# Allegro board CC1310EM-SKY66115-4051 Rev2_0_2.brd
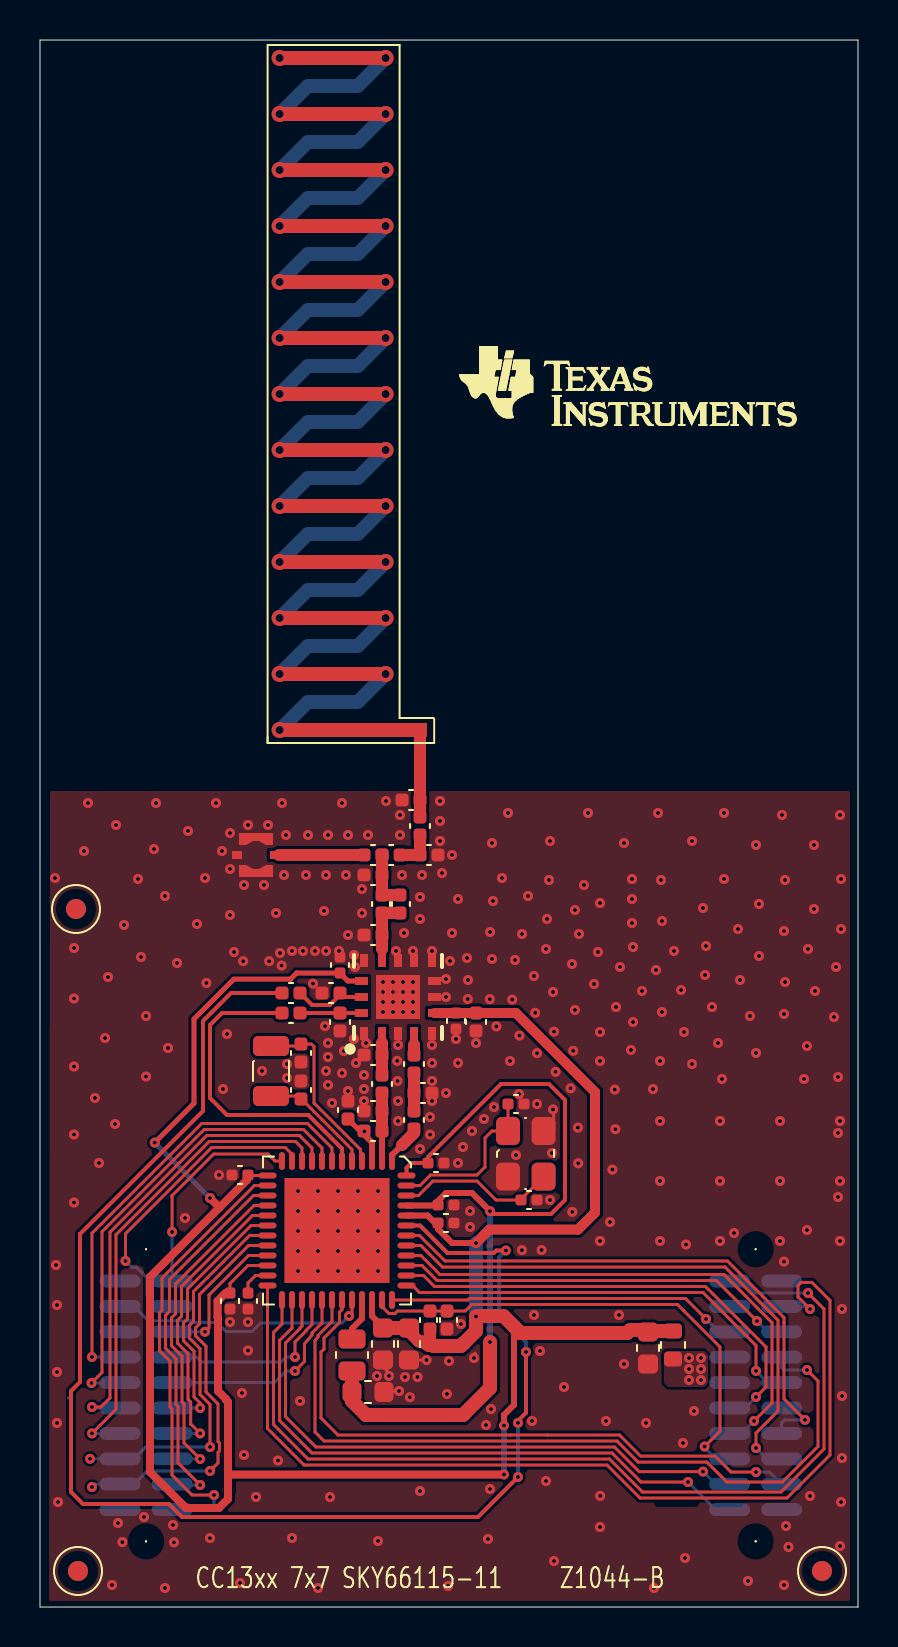
[diagram p0: board, top side]
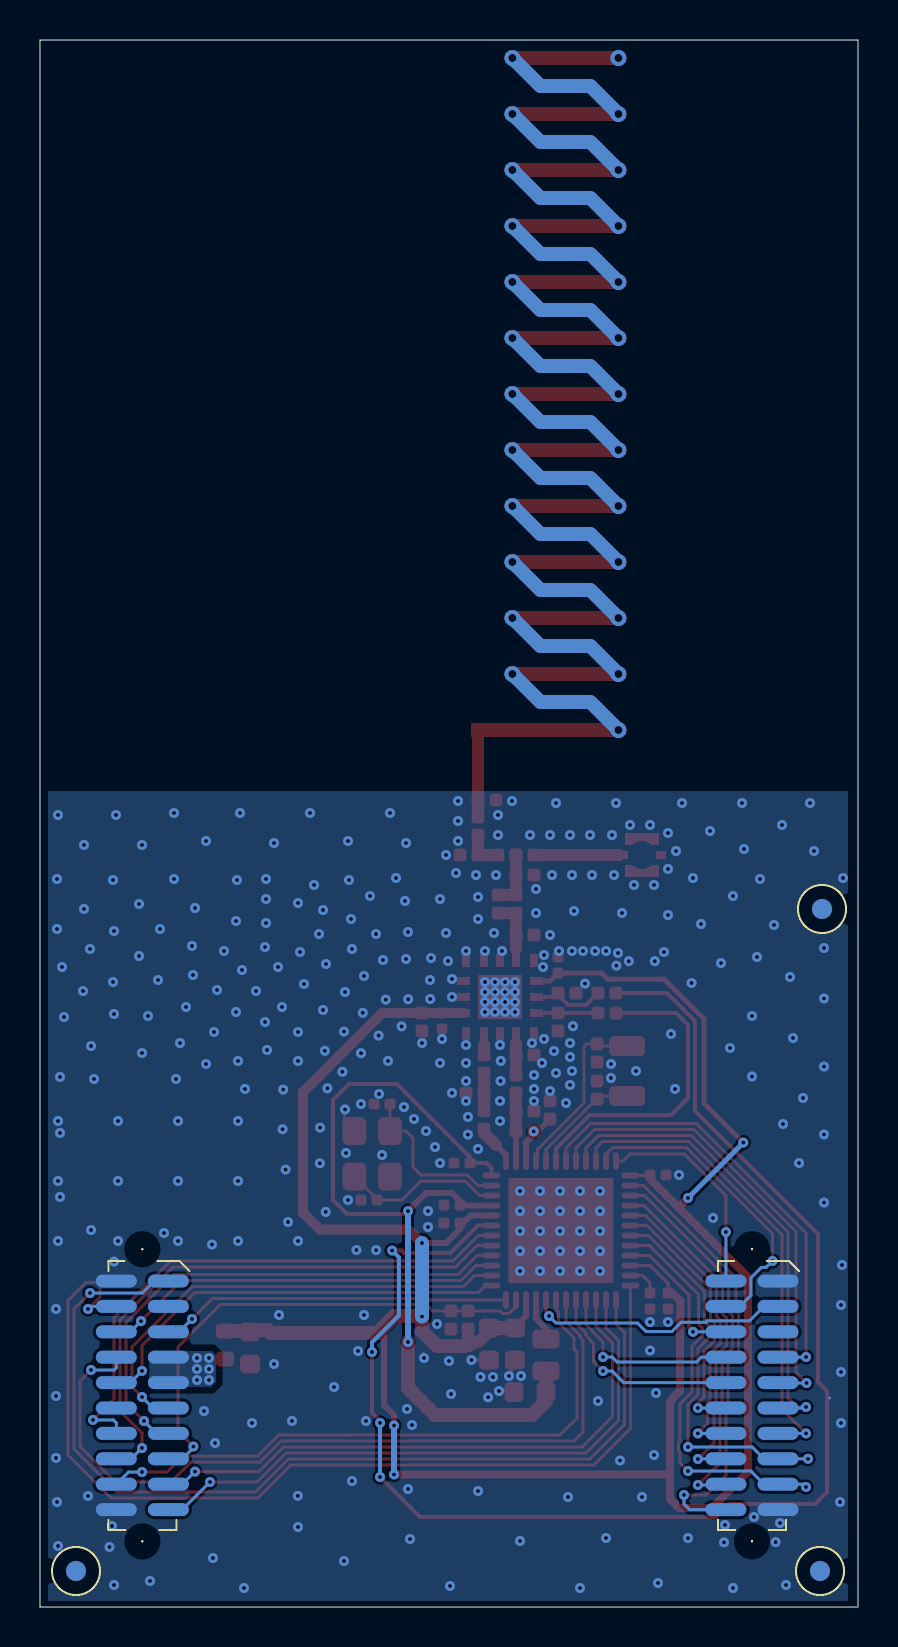
[diagram p1: board, bottom side, seen from below]

Outline 40.9 x 78.35 mm; copper layers: TOP, BOTTOM. Coordinates in mm from the lower left corner of the outline.
Outline path: 0,78.35 0,0 40.9,0 40.9,78.35 0,78.35

## Placement (name value [footprint] x y rotation side)
A2  ANTENNA  [ANTENNA_433MHZ_A]  11.5 43.85 90 top
ANT1  4.7pF  [CAPC1005X60N]  19 37.6 0 top
ANT2  56nH  [INDC1005X60N]  19 38.6 90 top
ANT3  DNM  [CAPC1005X60N]  19 40.35 180 top
C1  DNM  [CAPC1608X90N]  30.4 13.75 270 top
C11  4.7pF  [CAPC1005X60N]  16.2 24.8 0 top
C12  DNM  [CAPC1005X60N]  16.2 27.6 0 top
C25  1uF  [CAPC1005X60N]  21.8 29.7 270 top
C26  100nF  [CAPC1005X60L]  20.8 29.7 270 top
C29  100nF  [CAPC1005X60L]  15 31.7 90 top
C41  12pF  [CAPC1005X60N]  13.05 28.15 270 top
C46  1nF  [CAPC1005X60N]  15 29.7 270 top
C47  1nF  [CAPC1005X60N]  15 30.7 180 top
C51  12pF  [CAPC1005X60N]  13.05 25.4 90 top
C63  100pF  [CAPC1005X60N]  17.11 37.6 0 top
C72  DNM  [CAPC1005X60N]  16.2 37.6 0 top
C131  100nF  [CAPC1005X60L]  10.4 21.6 180 top
C221  100nF  [CAPC1005X60L]  9.5 15.7 270 top
C231  1uF  [CAPC1005X60L]  10.4 15.7 270 top
C331  22uF  [CAPC1608X90N]  15.6 10.75 0 top
C341  22uF  [CAPC1608X90N]  17.15 13.95 270 top
C342  100nF  [CAPC1608X90N]  18.45 13.95 270 top
C351  100nF  [CAPC1005X60N]  20.35 14.8 270 top
C441  100nF  [CAPC1005X60L]  19.9 19.2 0 top
C451  100nF  [CAPC1005X60L]  19.9 20.1 0 top
C461  DNM  [CAPC1005X60L]  24.05 20.35 0 top
C471  DNM  [CAPC1005X60L]  23.4 25.15 0 top
C481  100nF  [CAPC1005X60L]  19.4 22.2 0 top
C484  DNM  [CAPC1005X60N]  18 35.6 270 top
C485  DNM  [CAPC1005X60N]  16.2 33.6 0 top
C486  DNM  [CAPC1005X60N]  16.2 36.6 0 top
C487  0R  [CAPC1005X60N]  18.7 26.7 90 top
C488  330pF  [CAPC1005X60N]  15.4 25.3 270 top
C489  330pF  [CAPC1005X60N]  18.7 23.9 90 top
FIDU1  FIDU_1MM  [FID100X115]  1.9 1.8 0 top
FIDU2  FIDU_1MM  [FID100X115]  39.1 1.8 0 top
FIDU3  FIDU_1MM  [FID100X115]  1.8 34.9 0 top
FIDU4  FIDU_1MM  [FID100X115]  1.9 1.8 180 bottom
FIDU5  FIDU_1MM  [FID100X115]  39.1 1.8 180 bottom
FIDU6  FIDU_1MM  [FID100X115]  1.8 34.9 180 bottom
FL1  BLM18HE152SN1  [FIL_BLM18HE152SN1DL]  31.65 13.8 270 top
J1  SMA_MM5829-2700RJ4  [JSC_JACK]  10.8 37.6 90 top
L1  270nH  [INDC1005X60N]  16.2 23.8 0 top
L11  22nH  [INDC1005X60N]  17.1 25.7 90 top
L331  6.8uH  [INDC2012X150L]  15.6 13.4 270 top
L332  0R  [INDC1005X60N]  17.1 34.7 90 top
L333  DNM  [INDC1005X60N]  19.6 25.7 180 top
NOREF  -  []  21.95 63.05 0 top
NOREF#2  -  []  26.8 51.6 0 top
P1  SFM-110-02-S-D-A-K-TR  [SAMTEC_SFM11002AN]  4 16.3 0 bottom
P2  SFM-110-02-S-D-A-K-TR  [SAMTEC_SFM11002AN]  34.48 16.3 0 bottom
R21  1K  [RESC1005X40N]  13 29.7 180 top
R22  1K  [RESC1005X40N]  13 30.7 180 top
R351  100k  [RESC1005X40N]  19.5 14.8 270 top
U7  CC13xx 7x7  [QFNFC50P700X700X80-49CN]  17.6 22.3 180 top
U8  SKY66115-11  [MCM80P400X400-16-200]  17.9 30.5 90 top
Y1  32.768kHz  [XTAL_FC-135N]  11.55 28.05 270 top
Y2  24MHz  [OSCCC250X320X60-4N]  23.4 23.8 270 top

## Library data of the parts
A2 = ANTENNA
ANT1 C11 C488 C489 = CAPACITOR: User Part Number: #PN
ANT2 L1 = INDUCTOR: alternate symbols: (INDC1005X60L,INDC1005X60M)
ANT3 C12 C25 C41 C51 C63 C72 C351 C484-C487 = CAPACITOR: User Part Number: #PN; alternate symbols: (CAPC1005X60L,CAPC1005X60M)
C1 C331 C341 C342 = CAPACITOR: alternate symbols: (CAPC1608X90L,CAPC1608X90M)
C26 C29 C131 C221 C231 C441 C451 C461 C471 C481 = CAPACITOR: alternate symbols: (CAPC1005X60L,CAPC1005X60M)
C46 C47 = CAPACITOR: alternate symbols: (CAPC1005X60M,CAPC1005X60L)
FIDU1-FIDU6 = FIDMARK
FL1 = FILTER_2PIN: alternate symbols: (FIL_BLM18HE152SN1DL,FIL_BLM18HE152SN1DM)
J1 = SMA_MM5829-2700RJ4
L11 L332 L333 = INDUCTOR: alternate symbols: (INDC1005X60M,INDC1005X60L)
L331 = INDUCTOR
P1 P2 = CONN_HEADER_2X10_P_S
R21 R22 R351 = RESISTOR: alternate symbols: (RESC1005X40L,RESC1005X40M)
U7 = IC_RF_CC13XX_7X7_QFN48_V2_1: alternate symbols: (QFNFC50P700X700X80-49CL,QFNFC50P700X700X80-49CM)
U8 = SKY66115-11
Y1 = CRYSTAL: alternate symbols: (XTAL_FC-135L,XTAL_FC-135M)
Y2 = XTAL_4PIN_S: alternate symbols: (OSCCC250X320X60-4L,OSCCC250X320X60-4M)

## Footprints (pads in the part's own frame, mm; a bottom-side part is the same pattern mirrored in y, then rotated)
ANTENNA_433MHZ_A
  rect 0.7x0.7 smd: 1(0,-7.5)
CAPC1005X60L
  custom 0.55x0.54 smd: 1(0,0) 2(0.8,0)
CAPC1005X60N
  custom 0.65x0.64 smd: 1(0,0) 2(0.9,0)
CAPC1608X90N
  custom 0.95x1 smd: 1(0,0) 2(1.6,0)
FID100X115
  oval 1x1 smd: 1(0,0)
FIL_BLM18HE152SN1DL
  custom 0.75x0.9 smd: 1(0,0) 2(1.4,0)
INDC1005X60N
  custom 0.65x0.64 smd: 1(0,0) 2(0.9,0)
INDC2012X150L
  custom 0.95x1.352 smd: 1(0,0) 2(1.6,0)
JSC_JACK
  rect 0.4x0.5 smd: 1(0,-0.95) 2(0,0.95)
  custom 0.6x1.7 smd: 3(0.8,0) 4(-0.8,0)
MCM80P400X400-16-200
  rect 0.65x0.4 smd: 1(-1.825,1.7) 2(-1.825,0.8) 3(-1.825,0) 4(-1.825,-0.8) 5(-1.825,-1.7) 9(1.825,-1.7) 10(1.825,-0.8) 11(1.825,0) 12(1.825,0.8) 13(1.825,1.7)
  rect 0.4x0.65 smd: 6(-0.8,-1.825) 7(0,-1.825) 8(0.8,-1.825) 14(0.8,1.825) 15(0,1.825) 16(-0.8,1.825)
  rect 2.2x2.2 smd: 17(0,0)
OSCCC250X320X60-4N
  custom 1.4x1.2 smd: 1(0,0) 2(2.28,0) 3(2.28,1.78) 4(0,1.78)
QFNFC50P700X700X80-49CN
  oval 0.3x0.9 smd: 1(0,0) 2(0.5,0) 3(1,0) 4(1.5,0) 5(2,0) 6(2.5,0) 7(3,0) 8(3.5,0) 9(4,0) 10(4.5,0) 11(5,0) 12(5.5,0) 25(5.5,6.95) 26(5,6.95) 27(4.5,6.95) 28(4,6.95) 29(3.5,6.95) 30(3,6.95) 31(2.5,6.95) 32(2,6.95) 33(1.5,6.95) 34(1,6.95) 35(0.5,6.95) 36(0,6.95)
  oval 0.9x0.3 smd: 13(6.225,0.725) 14(6.225,1.225) 15(6.225,1.725) 16(6.225,2.225) 17(6.225,2.725) 18(6.225,3.225) 19(6.225,3.725) 20(6.225,4.225) 21(6.225,4.725) 22(6.225,5.225) 23(6.225,5.725) 24(6.225,6.225) 37(-0.725,6.225) 38(-0.725,5.725) 39(-0.725,5.225) 40(-0.725,4.725) 41(-0.725,4.225) 42(-0.725,3.725) 43(-0.725,3.225) 44(-0.725,2.725) 45(-0.725,2.225) 46(-0.725,1.725) 47(-0.725,1.225) 48(-0.725,0.725)
  rect 5.25x5.25 smd: 49(2.75,3.475)
RESC1005X40N
  custom 0.65x0.64 smd: 1(0,0) 2(0.9,0)
SAMTEC_SFM11002AN
  round 0.099 hole 1.501 unplated: (1.302,-1.588) (1.302,13.018)
  oval 2.05x0.65 smd: 1(0,0) 2(2.604,0) 3(0,1.27) 4(2.604,1.27) 5(0,2.54) 6(2.604,2.54) 7(0,3.81) 8(2.604,3.81) 9(0,5.08) 10(2.604,5.08) 11(0,6.35) 12(2.604,6.35) 13(0,7.62) 14(2.604,7.62) 15(0,8.89) 16(2.604,8.89) 17(0,10.16) 18(2.604,10.16) 19(0,11.43) 20(2.604,11.43)
XTAL_FC-135N
  custom 1x1.8 smd: 1(0,0) 2(2.5,0)

## Nets
GND: ANT1.2 ANT3.2 C1.2 C11.1 C12.1 C25.2 C26.2 C29.2 C41.2 C46.2 C47.2 C51.2 C131.2 C221.2 C231.2 C331.2 C341.2 C342.2 C351.2 C441.2 C451.2 C461.2 C471.2 C481.2 C485.1 C486.1 C488.1 J1.2 J1.3 J1.4 L333.1 P1.1 P1.19 P2.2 P2.20 U7.49(VSS) U8.1(GND_1) U8.3(GND_3) U8.5(GND_5) U8.7(GND_7) U8.8(GND_8) U8.9(GND_9) U8.10(GND_10) U8.11(GND_11) U8.13(GND_13) U8.17(PAD) Y2.2 Y2.4
VDD_EB: FL1.2 P2.7 P2.9
VDDR: C331.1 C451.1 C481.1 L331.2 U7.45(VDDR#45) U7.48(VDDR#48)
VDDS: C1.1 C25.1 C26.1 C29.1 C131.1 C221.1 C341.1 C342.1 C441.1 FL1.1 R351.2 U7.13(VDDS2) U7.22(VDDS3) U7.34(VDDS_DCDC) U7.44(VDDS) U8.6(VCC) U8.14(VDD)
DCDC_SW: L331.1 U7.33(DCDC_SW)
DIO_1: R21.2 U7.6(DIO_1)
DIO_2: P1.7 U7.7(DIO_2)
DIO_3: P1.9 U7.8(DIO_3)
DIO_4: P1.11 U7.9(DIO_4)
DIO_5: P1.13 U7.10(DIO_5)
DIO_6: P1.4 U7.11(DIO_6)
DIO_7: P1.2 U7.12(DIO_7)
DIO_8 / SPI MISO: P1.20 U7.14(DIO_8)
DIO_9 / SPI MOSI: P1.18 U7.15(DIO_9)
DIO_10 / SPI CLK: P1.16 U7.16(DIO_10)
DIO_11 / SPI SS: P1.14 U7.17(DIO_11)
DIO_12: P1.12 U7.18(DIO_12)
DIO_13: P1.15 U7.19(DIO_13)
DIO_14: P1.17 U7.20(DIO_14)
DIO_15: P1.6 U7.21(DIO_15)
DIO_16 / JTAG TDO: P2.19 U7.26(DIO_16)
DIO_17 / JTAG TDI: P2.17 U7.27(DIO_17)
DIO_18: P1.8 U7.28(DIO_18)
DIO_19: P1.10 U7.29(DIO_19)
DIO_20: P2.8 U7.30(DIO_20)
DIO_21: P2.18 U7.31(DIO_21)
DIO_22: P1.3 U7.32(DIO_22)
DIO_23: P2.5 U7.36(DIO_23)
DIO_24: P2.10 U7.37(DIO_24)
DIO_25: P2.11 U7.38(DIO_25)
DIO_26: P2.6 U7.39(DIO_26)
DIO_27: P2.13 U7.40(DIO_27)
DIO_28: P2.16 U7.41(DIO_28)
DIO_29: P2.14 U7.42(DIO_29)
DIO_30: R22.2 U7.43(DIO_30)
JTAG_TCK: P2.1 U7.25(JTAG_TCKC)
JTAG_TMS: P2.4 U7.24(JTAG_TMSC)
NRESET: C351.1 P2.15 R351.1 U7.35(RESET_N)
N310466: C471.1 U7.47(X24M_P) Y2.1
N310868: C461.1 U7.46(X24M_N) Y2.3
N314488: C11.2 L1.2 L11.1 U7.2(RF_N)
N316022: A2.1(FEED/GND_1) ANT2.2 ANT3.1
N316651: C231.1 U7.23(DCOUPL)
N316919: C41.1 U7.4(X32K_Q1) Y1.1
N316932: C51.1 U7.5(X32K_Q2) Y1.2
N342232: ANT1.1 ANT2.1 C63.2
N347200: C12.2 L11.2 U8.2(RX)
N354233: C72.1 J1.1
N403626: C63.1 C72.2 C484.1 C486.2 L332.2
N438793: C46.1 R21.1 U8.16(CTX)
N438802: C47.1 R22.1 U8.15(CSD)
N466935: C488.2 L1.1 U7.3(RX_TX)
N487790: C484.2 C485.2 L332.1 U8.12(ANT)
N493453: C487.2 U8.4(TX)
N493483: C487.1 C489.2 L333.2
N503467: C489.1 U7.1(RF_P)

Pads without a net: FIDU1 1; FIDU2 1; FIDU3 1; FIDU4 1; FIDU5 1; FIDU6 1; P1 5; P2 3 12

## Via types
v1: diameter 0.8, hole 0.4, TOP to BOTTOM, 25 vias
v2: diameter 0.5, hole 0.2, TOP to BOTTOM, 422 vias

## Routing (per net, layer and track width the routed paths; a pad name or vN(x,y) marks a point on that pad's centre or on a via; arc(x,y) is an arc through that point)
GND: length 4.1
  TOP w0.15: v2(17.95,10.8) 17.2,10.8 17.1,10.7 ; v2(17.45,11.55) 17.45,11.7 17.15,12 C341.2 ; v2(25.65,24.88) 25.65,24.8 25.68,24.77 25.68,23.8 ; v2(14.9,18.8) 14.88,18.82 U7.49 ; C342.2 v2(19.33,12.35) ; 21.75,12.7 21.75,12.45
  BOTTOM w0.15: 1.43,10.45 1.43,10.45
  vias: v2(0.75,36.45) v2(0.8,17.1) v2(0.85,15.1) v2(0.85,11.75) v2(0.85,9.2) v2(0.9,5.25) v2(1.7,32.95) v2(1.7,30.42) v2(1.7,27.02) v2(1.7,23.62) v2(1.7,20.22) v2(2.2,37.8) v2(2.4,40.2) v2(2.75,25.45) v2(2.95,22.2) v2(3.25,28.45) v2(3.4,31.5) v2(3.6,1.1) v2(3.75,24.15) v2(3.8,39.1) v2(3.9,4.2) v2(4.12,3.24) v2(4.2,34.1) v2(4.9,36.4) v2(5.05,32.5) v2(5.2,4.5) v2(5.3,29.55) v2(5.3,26.52) v2(5.7,37.9) v2(5.8,40.2) v2(6.25,35.55) v2(6.25,0.95) v2(6.4,27.95) v2(6.65,4.1) v2(6.7,3.23) v2(6.85,32.2) v2(7.25,19.45) v2(7.4,38.8) v2(7.85,34.15) v2(8.25,36.45) v2(8.32,31.2) v2(8.5,3.45) v2(8.8,40.2) v2(8.95,21.6) v2(9.1,37.8) v2(9.15,25.9) v2(9.35,28.65) v2(9.5,38.7) v2(9.5,36.9) v2(9.5,34.6) v2(9.5,14.25) v2(9.7,32.75) v2(10,1.2) v2(10.1,10.7) v2(10.2,36.1) v2(10.16,32.29) v2(10.2,7.6) v2(10.4,39.1) v2(10.4,14.25) v2(10.4,12.82) v2(10.8,5.5) v2(11.1,26.8) v2(11.2,36.1) v2(11.4,39.1) v2(11.46,32.29) v2(11.8,34.7) v2(11.9,7.32) v2(12,32.7) v2(12.1,40.2) v2(12.08,32.07) v2(12.2,36.6) v2(12.3,38.6) v2(12.35,27.15) v2(12.35,26.45) v2(12.6,32.8) v2(12.6,3.45) v2(12.9,20.8) v2(12.9,19.8) v2(12.9,18.8) v2(12.9,17.8) v2(12.9,16.8) v2(13,10.3) v2(13.15,32.8) v2(13.3,36.6) v2(13.4,38.6) v2(13.65,31.17) v2(13.75,32.8) v2(13.9,20.8) v2(13.9,19.8) v2(13.9,18.8) v2(13.9,17.8) v2(13.9,16.8) v2(13.9,0.95) v2(14.2,34.8) v2(14.3,36.6) v2(14.3,32.8) v2(14.25,29.04) v2(14.3,26.8) v2(14.4,38.6) v2(14.4,28.2) v2(14.4,27.5) v2(14.4,26.1) v2(14.5,5.5) v2(14.6,25.2) v2(14.9,20.8) v2(14.9,19.8) v2(14.9,17.8) v2(14.9,16.8) v2(14.95,32.8) v2(15.1,40.2) v2(15.1,26.7) v2(15.2,27.8) v2(15.3,36.6) v2(15.4,38.6) v2(15.4,33.6) v2(15.4,25.8) v2(15.7,32.6) v2(15.75,32) v2(15.7,28.4) v2(15.8,27.2) v2(15.9,20.8) v2(15.9,19.8) v2(15.9,18.8) v2(15.9,17.8) v2(15.9,16.8) v2(16.1,35.9) v2(16.1,34.7) v2(16.2,26.6) v2(16.2,25.9) v2(16.2,25.3) v2(16.3,28.2) v2(16.4,38.6) v2(16.85,11.55) v2(16.9,20.8) v2(16.9,19.8) v2(16.9,18.8) v2(16.9,17.8) v2(16.9,16.8) v2(16.9,3.3) v2(17.15,31.25) v2(17.15,30.75) v2(17.15,30.25) v2(17.15,29.75) v2(17.3,40.3) v2(17.65,31.25) v2(17.65,30.75) v2(17.65,30.25) v2(17.65,29.75) v2(17.8,32.8) v2(17.9,28.1) v2(17.86,27.3) v2(17.88,26.3) v2(17.9,25.3) v2(17.9,24.3) v2(18,39.6) v2(18,38.6) v2(18.1,36.6) v2(18.2,33.7) v2(18.15,31.25) v2(18.15,30.75) v2(18.15,30.25) v2(18.15,29.75) v2(18.25,11.5) v2(18.5,10.49) v2(18.65,32.8) v2(18.65,31.25) v2(18.65,30.75) v2(18.65,30.25) v2(18.65,29.75) v2(18.88,11.5) v2(19,35.5) v2(19,34.4) v2(19,22.9) v2(19,5.8) v2(19.1,36.6) v2(19.5,24.5) v2(19.51,23.62) v2(19.6,32.8) v2(19.6,28.1) v2(19.6,27.2) v2(19.6,26.3) v2(19.6,25.3) v2(20,40.3) v2(20,39.3) v2(20,38.3) v2(20.1,36.7) v2(20.3,31.4) v2(20.3,30.5) v2(20.3,25.7) v2(20.35,10.65) v2(20.45,12.3) v2(20.4,1.05) v2(20.5,32.3) v2(20.6,37.6) v2(20.6,33.7) v2(20.8,28.4) v2(20.9,35.4) v2(20.9,27.2) v2(20.9,22.2) v2(21.05,14.15) v2(21.15,23) v2(21.35,32.45) v2(21.4,31.35) v2(21.39,30.4) v2(21.5,19.8) v2(21.5,19) v2(21.6,23.8) v2(21.7,12.45) v2(21.8,28.2) v2(22.2,24.4) v2(22.3,9.1) v2(22.4,3.4) v2(22.5,33.75) v2(22.49,30.39) v2(22.5,5.9) v2(22.6,38.2) v2(22.6,32.4) v2(22.55,9.9) v2(22.65,35.3) v2(22.7,25) v2(22.82,29.03) v2(23.1,36.45) v2(23.4,39.7) v2(23.5,27.3) v2(23.61,30.37) v2(23.75,32.35) v2(23.8,22.6) v2(23.95,25.65) v2(23.97,28.57) v2(24.1,33.65) v2(24.09,17.84) v2(24.4,35.55) v2(24.6,9.3) v2(24.7,31.55) v2(24.7,14.6) v2(24.76,29.71) v2(24.85,27.69) v2(24.85,25.15) v2(25,12.8) v2(25.08,17.85) v2(25.35,34.4) v2(25.3,32.9) v2(25.3,6.3) v2(25.45,36.35) v2(25.5,38.3) v2(25.5,20.35) v2(25.6,22.7) v2(25.65,30.75) v2(25.7,28.77) v2(25.7,2.3) v2(25.78,26.76) v2(26.2,11) v2(26.53,25.93) v2(26.6,32.15) v2(26.62,19.75) v2(26.75,34.85) v2(26.75,29.85) v2(26.66,27.81) v2(26.95,33.65) v2(26.89,23.97) v2(26.91,22.18) v2(27.2,36.1) v2(27.4,39.7) v2(27.7,31.15) v2(27.9,32.75) v2(28,35.2) v2(28,28.75) v2(28,27.3) v2(28,18.3) v2(28.01,5.55) v2(28,4) v2(28.3,9.3) v2(28.5,19.25) v2(28.62,21.87) v2(28.74,25.87) v2(28.8,30) v2(28.77,23.89) v2(28.95,14.6) v2(29,32) v2(29.2,38.2) v2(29.2,12.15) v2(29.6,36.4) v2(29.6,35.4) v2(29.6,34.2) v2(29.65,33) v2(29.65,29.25) v2(29.55,27.85) v2(30.1,30.8) v2(30.3,9.2) v2(30.65,25.9) v2(30.7,0.95) v2(30.8,31.85) v2(30.9,39.7) v2(31,27.3) v2(31,24.3) v2(31,21.3) v2(31,18.3) v2(31.05,36.35) v2(31.1,34.3) v2(31.1,29.75) v2(31.7,32.8) v2(32.05,30.85) v2(32.15,8.2) v2(32.2,28.75) v2(32.3,18.12) v2(32.25,2.45) v2(32.6,38.3) v2(32.6,27.15) v2(32.7,9.8) v2(33.15,34.95) v2(33.3,33.05) v2(33.25,31.6) v2(33.6,30) v2(33.9,28.2) v2(34,24.3) v2(34,21.3) v2(34,18.3) v2(34.1,26.4) v2(34.2,39.7) v2(34.2,36.4) v2(34.7,18.7) v2(34.9,33.9) v2(35,31.35) v2(35.4,1.3) v2(35.5,29.55) v2(35.8,38.1) v2(35.8,27.7) v2(35.95,35.15) v2(35.95,32.55) v2(37,24.3) v2(37,21.3) v2(37,18.3) v2(37.1,39.6) v2(37.2,33.8) v2(37.2,29.65) v2(37.2,17.27) v2(37.2,1.1) v2(37.25,36.35) v2(37.25,31.25) v2(37.3,4.05) v2(37.42,3) v2(38.2,26.4) v2(38.4,32.9) v2(38.35,28.05) v2(38.35,18.85) v2(38.5,5.55) v2(38.7,38.1) v2(38.7,34.9) v2(38.75,30.8) v2(39.7,29.5) v2(39.8,32) v2(39.9,26.5) v2(39.9,23.7) v2(39.9,20.5) v2(40,39.6) v2(40,24.3) v2(40,21.3) v2(40,18.3) v2(40,3.05) v2(40.05,36.4) v2(40.05,33.9) v2(40.1,14.9) v2(40.1,10.55) v2(40.1,7.45) v2(40.05,5.25)
VDD_EB:
  vias: v2(32.45,12.45) v2(32.45,11.9) v2(32.45,11.35) v2(33.05,12.45) v2(33.05,11.9) v2(33.05,11.35)
VDDR: length 42.7
  TOP w0.2: U7.48 18.32,21.95 18.57,22.2 C481.1 19.4,22.5 23.05,26.15 25.45,26.15 26.25,25.35 26.25,20.35 25.55,19.65 22.65,19.65 22.5,19.8
  TOP w0.3: U7.45 19.88,20.07 C451.1 19.9,20.3 20.3,20.7 21.6,20.7 22.5,19.8 v2(22.5,19.79)
  TOP w0.7: v2(22.5,13.25) 22.5,10.95 21.15,9.6 16.3,9.6 15.6,10.3 C331.1 L331.2
  BOTTOM w0.3: v2(22.5,13.25) v2(22.5,19.79)
VDDS: length 128.2
  TOP w0.15: 11.38,17.07 10.4,17.07 9.5,16.18 C221.1 ; 17.1,14.05 17.05,14.1 ; 17.1,14.05 17.15,14 C341.1 ; 17.1,14.05 17.2,14.05 ; C131.1 10.43,21.57 11.38,21.57
  TOP w0.2: 9.28,15.7 C221.1 ; 10.35,21.55 C131.1
  TOP w0.25: v2(5.74,23.22) 7.7,25.18 7.7,29.4 9.69,31.39 12.52,31.39 12.83,31.7 C29.1 ; C29.1 15,31.69 15.39,31.3 U8.14 ; C29.1 15,31.71
  TOP w0.3: 19.5,13.28 19.38,13.17 19.24,13.17 ; v2(21.8,14.52) 21.82,14.55 ; 17.3,13.95 17.2,14.05 ; 23.18,14.55 23.2,14.52 ; v2(23.2,9.07) 23.2,9.6 23.7,10.1 23.7,14.02 ; 17.05,14.1 16.6,14.55 U7.34 ; U7.44 19.38,19.57 19.75,19.2 C441.1 19.9,18.9 20.6,18.2 v2(21.8,18.2) ; C1.1 30.4,13.75 30.55,13.9 30.65,13.8 30.65,13.8 ; 18.45,14 18.4,13.95
  TOP w0.4: 9.4,6.59 9.44,6.62 v2(23.2,6.62) ; 9.4,6.59 9.4,5.4 8.95,4.95 7.3,4.95 5.5,6.75 5.5,16.5 8.97,19.97 ; 9.4,6.59 9.4,10.25 9.3,10.35 9.3,10.4 8.9,10.8 8.9,14.46 8.88,14.48 8.88,15.3 9.28,15.7 ; 10.35,21.55 10.35,21.35 8.97,19.97 ; 8.97,19.97 v2(8.5,20.45)
  TOP w0.5: U8.6 C26.1 C25.1 23.79,29.7 27.75,25.74 27.75,19.72 26.9,18.87 22.47,18.87 v2(21.8,18.2)
  TOP w0.6: 18.45,14 C342.1 18.45,13.77 18.94,13.28 19.14,13.28 19.24,13.17 ; R351.2 19.5,13.28
  TOP w0.7: 21.82,14.55 23.18,14.55 ; FL1.1 30.65,13.8 ; 18.4,13.95 17.3,13.95 ; 23.2,14.52 24.02,13.7 29.36,13.7 29.51,13.85 30.5,13.85 ; 19.38,13.17 19.45,13.1 19.64,13.1 19.69,13.05 21.04,13.05 21.19,13.2 21.2,13.2 21.8,13.8 v2(21.8,14.52)
  BOTTOM w0.25: v2(8.5,20.45) 5.74,23.21 v2(5.74,23.22)
  BOTTOM w0.3: v2(23.2,6.62) v2(23.2,9.07)
  BOTTOM w0.7: v2(21.8,14.52) v2(21.8,18.2)
DCDC_SW: length 2.2
  TOP w0.3: L331.1 15.6,13.92 16.1,14.42 U7.33
DIO_1: length 15.8
  TOP w0.2: U7.6 15.1,22.91 13.41,24.6 9.35,24.6 8.5,25.45 8.5,29.1 9.1,29.7 R21.2
DIO_2: length 23
  TOP w0.15: v2(2.6,12.5) 2.6,18.69 8.08,24.17 13.38,24.17 14.6,22.95 U7.7
  BOTTOM w0.15: v2(2.6,12.5) 2.8,12.5 2.81,12.49 P1.7
DIO_3: length 23.4
  TOP w0.15: U7.8 14.1,22.95 13.18,23.87 8.21,23.87 3.1,18.77 3.1,11.72 2.9,11.52 v2(2.57,11.2)
  BOTTOM w0.15: v2(2.57,11.2) 3.98,11.2 P1.9
DIO_4: length 23.8
  TOP w0.15: v2(2.6,10) 3.05,10 3.5,10.45 3.5,18.74 8.33,23.57 12.98,23.57 13.6,22.95 U7.9
  BOTTOM w0.15: v2(2.6,10) 2.8,10 2.85,9.95 P1.11
DIO_5: length 23.9
  TOP w0.15: U7.10 13.1,22.95 12.78,23.27 8.46,23.27 3.8,18.62 3.8,9.88 v2(2.6,8.68)
  BOTTOM w0.15: P1.13 v2(2.6,8.68)
DIO_6: length 15.7
  TOP w0.15: U7.11 12.6,22.64 12.27,22.97 8.58,22.97 4.28,18.67 v2(4.28,17.3)
  BOTTOM w0.15: P1.4 5.9,15.03 5.35,15.58 5.35,16.46 4.83,16.98 4.59,16.98 v2(4.28,17.3)
DIO_7: length 10.8
  TOP w0.15: U7.12 11.75,22.3 11.4,22.65 8.68,22.65 6.59,20.56 6.6,20.55 v2(6.6,18.75)
  BOTTOM w0.15: P1.2 v2(6.6,18.75)
DIO_8 / SPI MISO: length 22.5
  TOP w0.15: v2(8.7,5.6) 7.6,5.6 6.6,6.6 6.6,9.9 6.5,10 6.5,12.29 5.97,12.81 5.97,14.71 6.1,14.83 6.1,16.45 10.72,21.07 11.38,21.07
  BOTTOM w0.15: P1.20 8.42,4.87 8.7,5.15 v2(8.7,5.6)
DIO_9 / SPI MOSI: length 19.1
  TOP w0.15: v2(8.01,6.1) 6.9,7.21 6.9,10.03 6.8,10.13 6.8,12.41 6.28,12.94 6.28,14.58 6.47,14.78 6.47,15.52 6.47,15.52 6.47,16.27 6.47,16.27 6.47,16.37 10.68,20.57 11.38,20.57
  BOTTOM w0.15: v2(8.01,6.1) 6.64,6.1 P1.18
DIO_10 / SPI CLK: length 17.1
  TOP w0.15: 11.38,20.07 10.7,20.07 6.77,16.15 6.77,15.65 6.78,15.65 6.78,14.66 6.58,14.46 6.58,13.06 7.1,12.54 7.1,10.25 7.2,10.15 7.2,8.21 v2(8.01,7.4)
  BOTTOM w0.15: P1.16 7.83,7.41 7.84,7.4 v2(8.01,7.4)
DIO_11 / SPI SS: length 15.1
  TOP w0.15: 11.38,19.57 10.63,19.57 7.07,16.02 7.07,15.77 7.08,15.77 7.08,14.53 6.88,14.33 6.88,13.19 7.4,12.66 7.4,10.38 7.53,10.25 7.53,9.75 7.53,9.75 7.53,9.15 v2(8.01,8.68)
  BOTTOM w0.15: v2(8.01,8.68) P1.14
DIO_12: length 13.1
  TOP w0.15: 11.38,19.07 10.55,19.07 7.38,15.9 7.38,14.41 7.17,14.21 7.17,13.31 7.7,12.79 7.7,10.5 8.01,10.2 v2(8.01,9.95)
  BOTTOM w0.15: v2(8.01,9.95) P1.12
DIO_13: length 19.4
  TOP w0.15: v2(8.5,8) 8.5,10.13 8,10.63 8,12.91 7.47,13.44 7.47,14.08 7.67,14.28 7.67,15.77 10.48,18.57 11.38,18.57
  BOTTOM w0.15: v2(2.5,7.41) P1.15 4.7,7.41 5.29,8 v2(8.5,8)
DIO_14: length 20.2
  TOP w0.15: 11.38,18.07 10.43,18.07 7.97,15.62 7.97,14.16 7.78,13.96 7.78,13.56 8.3,13.04 8.3,10.75 8.9,10.15 8.9,8.27 8.97,8.2 8.97,7.8 8.9,7.73 8.9,7.2 v2(8.5,6.8)
  BOTTOM w0.15: v2(2.6,6) 2.74,6.14 P1.17 4.7,6.14 5.36,6.8 v2(8.5,6.8)
DIO_15: length 7.3
  TOP w0.15: 11.38,17.57 10.43,17.57 8.45,15.6 8.45,13.96 v2(8.25,13.76)
  BOTTOM w0.15: P1.6 v2(8.25,13.76)
DIO_16 / JTAG TDO: length 30.6
  TOP w0.15: U7.26 12.6,13.95 11.97,13.32 11.97,9.32 13.6,7.7 28.6,7.7 30.05,6.25 v2(32.4,6.25)
  BOTTOM w0.15: P2.19 33.78,4.87 v2(32.4,6.25)
DIO_17 / JTAG TDI: length 29.8
  TOP w0.15: U7.27 13.1,14.05 13,13.95 13,13.92 12.28,13.2 12.28,9.52 13.79,8 28.73,8 29.95,6.77 v2(33.15,6.77)
  BOTTOM w0.15: v2(33.15,6.77) 33.78,6.14 P2.17
DIO_18: length 9.6
  TOP w0.15: U7.28 13.6,14.13 13.3,13.83 13.3,13.8 12.75,13.25 v2(12.75,12.5)
  BOTTOM w0.15: v2(12.75,12.5) 12.3,12.5 12.05,12.25 8.07,12.25 7.83,12.49 P1.8
DIO_19: length 10.5
  TOP w0.15: U7.29 14.1,14.21 14.08,14.18 13.6,13.7 13.6,13.6 13.22,13.15 13.22,12.27 v2(12.75,11.8)
  BOTTOM w0.15: v2(12.75,11.8) 12.3,11.8 11.72,11.22 P1.10
DIO_20: length 39.8
  TOP w0.15: v2(38.35,11.85) 38.9,11.3 38.9,8.03 37.12,6.25 34.34,6.25 33.35,7.24 29.91,7.24 28.85,8.3 14.2,8.3 13.75,8.75 13.75,13.32 13.9,13.5 13.9,13.58 14.6,14.28 U7.30
  BOTTOM w0.15: v2(38.35,11.85) 37.2,11.85 37.08,11.96 P2.8
DIO_21: length 30.7
  TOP w0.15: U7.31 15.1,14.87 14.98,14.75 14.98,14.23 14.2,13.45 14.2,12.9 14.05,12.75 14.05,9.45 14.9,8.6 23.52,8.6 23.52,8.6 25.37,8.6 28.98,8.6 30.03,7.54 33.75,7.54 34.55,6.75 v2(35.8,6.75)
  BOTTOM w0.15: P2.18 36.47,6.75 v2(35.8,6.75)
DIO_22: length 13.2
  TOP w0.15: U7.32 15.6,14.7 v2(15.45,14.55)
  BOTTOM w0.15: v2(15.45,14.55) 15.1,14.2 11.02,14.2 10.6,13.77 9.3,13.77 8.84,14.23 7.61,14.23 7.53,14.31 5.42,14.31 4.7,15.03 P1.3
DIO_23: length 17.6
  TOP w0.15: v2(33.3,14.4) 32.27,15.42 21.46,15.42 21.39,15.35 U7.36
  BOTTOM w0.15: P2.5 33.94,13.76 v2(33.3,14.4)
DIO_24: length 21.5
  TOP w0.15: v2(35.8,11.8) 35.8,13.07 33.15,15.72 18.98,15.72 18.62,16.07 U7.37
  BOTTOM w0.15: P2.10 36.38,11.22 v2(35.8,11.8)
DIO_25: length 23.7
  TOP w0.15: v2(35.8,10.5) 36.3,11 36.3,13 33.27,16.02 19.73,16.02 19.18,16.57 U7.38
  BOTTOM w0.15: v2(35.8,10.5) 35.25,9.95 P2.11
DIO_26: length 20.1
  TOP w0.15: v2(35.85,14.29) 33.82,16.32 19.85,16.32 19.1,17.07 U7.39
  BOTTOM w0.15: v2(35.85,14.29) 36.38,13.76 P2.6
DIO_27: length 26.4
  TOP w0.15: v2(35.7,9.3) 36.6,10.2 36.6,14.22 35.52,15.29 35.52,15.3 34.2,16.62 19.99,16.62 19.05,17.57 U7.40
  BOTTOM w0.15: P2.13 35.08,8.68 v2(35.7,9.3)
DIO_28: length 28.5
  TOP w0.15: U7.41 19.04,18.07 20.12,17 34.25,17 35.83,15.42 35.83,15.41 36.9,14.34 36.9,9.8 35.8,8.7 v2(35.8,7.95)
  BOTTOM w0.15: P2.16 37.07,7.4 36.35,7.4 v2(35.8,7.95)
DIO_29: length 27.9
  TOP w0.15: U7.42 18.98,18.57 20.25,17.3 23.23,17.3 34.12,17.3 34.38,17.3 36.13,15.55 36.13,15.54 37.2,14.46 37.2,14.22 37.2,10.4 v2(38.25,9.35)
  BOTTOM w0.15: P2.14 37.08,9.21 37.23,9.35 v2(38.25,9.35)
DIO_30: length 72.3
  TOP w0.2: R22.2 9.55,30.7 8.15,29.3 8.15,24.8 2,18.65 2,11.25 1.55,10.8 1.55,5.75 2.15,5.15 6.45,5.15 7.1,4.5 21.9,4.5 v2(23.9,6.5) ; v2(23.3,17.82) 22.82,17.82 22.69,17.7 20.38,17.7 19,19.07 U7.43 ; v2(24.3,12.75) 24.3,9.71 23.9,9.31 v2(23.9,9.2)
  BOTTOM w0.2: v2(24.3,12.75) 24.3,13.23 22.96,14.57 22.96,17.49 v2(23.3,17.82) ; v2(23.9,6.5) v2(23.9,9.2)
JTAG_TCK: length 48.5
  TOP w0.15: v2(38.4,15.7) 39.2,14.9 39.2,7.9 37.05,5.75 30.12,5.75 28.48,7.4 13.4,7.4 11.68,9.12 11.68,13.72 12.1,14.15 U7.25
  BOTTOM w0.15: P2.1 35.18,16.3 35.78,15.7 v2(38.4,15.7)
JTAG_TMS: length 50.3
  TOP w0.15: 11.38,16.07 11.38,8.92 13.2,7.1 28.35,7.1 30,5.45 37.35,5.45 39.5,7.6 39.5,15.33 38.6,16.23 38.05,16.23 37.9,16.08 37.9,15.5 v2(38.5,14.9)
  BOTTOM w0.15: P2.4 38.37,15.03 v2(38.5,14.9)
Net_6:
  vias: v1(11.98,43.85)
Net_7:
  vias: v1(11.98,77.45) v1(17.28,77.45)
Net_8:
  vias: v1(11.98,74.65) v1(17.28,74.65)
Net_9:
  vias: v1(11.98,71.85) v1(17.28,71.85)
Net_10:
  vias: v1(11.98,69.05) v1(17.28,69.05)
Net_11:
  vias: v1(11.98,66.25) v1(17.28,66.25)
Net_12:
  vias: v1(11.98,63.45) v1(17.28,63.45)
Net_13:
  vias: v1(11.98,60.65) v1(17.28,60.65)
Net_14:
  vias: v1(11.98,57.85) v1(17.28,57.85)
Net_15:
  vias: v1(11.98,55.05) v1(17.28,55.05)
Net_16:
  vias: v1(11.98,52.25) v1(17.28,52.25)
Net_17:
  vias: v1(11.98,49.45) v1(17.28,49.45)
Net_18:
  vias: v1(11.98,46.65) v1(17.28,46.65)
NRESET: length 25.3
  TOP w0.15: U7.35 17.1,15.02 17.44,14.67 17.76,14.67 17.88,14.8 R351.1 C351.1 21.26,14.8 21.59,15.12 31.87,15.12 32.2,14.8 32.2,14.8 34,13 34,8.79 33.55,8.34 33.55,8.34 v2(33.23,8.02)
  BOTTOM w0.15: v2(33.23,8.02) 33.23,7.96 33.78,7.41 P2.15
N310466: length 8.4
  TOP w0.15: U7.47 19,21.07 19.53,21.6 21.85,21.6 22.25,22 22.25,23.45 22.6,23.8 Y2.1 C471.1
N310868: length 8.1
  TOP w0.15: Y2.3 24.05,20.39 C461.1 22.8,20.35 21.86,21.29 19.65,21.29 18.93,20.57 U7.46
N314488: length 3.4
  TOP w0.3: 17.1,22.28 U7.2 L1.2
  TOP w0.6: L1.2 C11.2 L11.1
N316022: length 4.3
  TOP w0.6: A2.1 ANT3.1 ANT2.2
N316651: length 1.6
  TOP w0.15: 11.38,16.57 10.77,16.57 10.4,16.2 C231.1
N316919: length 9.3
  TOP w0.15: U7.4 16.02,22.37 16.02,22.87 13.7,25.2 13.7,28.02 13.57,28.15 C41.1 12.95,28.05 Y1.1 11.55,27.95 11.7,27.8
N316932: length 5.7
  TOP w0.15: Y1.2 12.85,25.55 13,25.4 C51.1 13.07,25.4 15.6,22.87 U7.5
N342232: length 2
  TOP w0.6: C63.2 ANT1.1 ANT2.1
N347200: length 2.2
  TOP w0.4: 17.1,28.8 U8.2 17.1,28.2
  TOP w0.6: L11.2 C12.2 17.1,28.2
N354233: length 4.5
  TOP w0.3: J1.1 11.95,37.6
  TOP w0.6: 11.95,37.6 C72.1
N403626: length 2.9
  TOP w0.6: C72.2 C486.2 L332.2 C484.1
N438793: length 3.1
  TOP w0.2: R21.1 C46.1 U8.16
N438802: length 3.7
  TOP w0.2: R22.1 13,30.7 13.61,30.1 14.49,30.1 14.96,30.57 14.96,30.66 C47.1 15.2,30.5 U8.15
N466935: length 2.7
  TOP w0.2: 16.2,23.8 L1.1
  TOP w0.254: v2(16.21,23.78) 16.02,23.78 15.4,24.39 C488.2
  TOP w0.3: v2(16.21,23.78) 16.22,23.78 16.22,23.61 16.6,23.23 U7.3
N487790: length 3.3
  TOP w0.4: 17.1,32.9 U8.12 17.1,32.3
  TOP w0.6: C484.2 L332.1 C485.2 17.1,32.9
N493453: length 1.1
  TOP w0.4: 18.7,28.1 U8.4 18.7,28.7
  TOP w0.6: 18.7,28.1 C487.2
N493483: length 1.9
  TOP w0.6: C489.2 L333.2 C487.1
N503467: length 2.1
  TOP w0.3: U7.1 17.6,22.6 18.1,23.1
  TOP w0.6: 18.1,23.1 18.7,23.7 C489.1

## Copper pours and planes (outline as drawn; the poured copper is in the pictures)
GND on TOP: 0.45,0.55 0.5,36.7 0.5,36.7 0.5,40.8 40.5,40.8 40.5,0.3 0.45,0.3 ; 15 cut-outs
GND on BOTTOM: 0.5,40.8 40.5,40.8 40.5,0.3 0.5,0.3 ; 7 cut-outs
VDD_EB on TOP: 31.4,12.8 33.2,12.8 33.4,12.6 33.4,11.2 33.2,11 31.4,11 31.2,11.2 31.2,12.6
VDD_EB on BOTTOM: 32.3,12.8 35.2,12.8 35.45,12.55 35.45,11.15 35.3,11 32.35,11 32.1,11.25 32.1,12.6
Net_6 on BOTTOM (solid shape): 17.03,46.9 17.53,46.9 17.53,46.4 16.73,45.6 16.13,45 16.01,44.93 15.88,44.9 13.53,44.9 12.23,43.6 11.73,43.6 11.73,44.1 13.13,45.5 13.25,45.57 13.38,45.6 15.73,45.6
Net_8 on BOTTOM (solid shape): 17.03,77.7 17.53,77.7 17.53,77.2 16.13,75.8 16.01,75.73 15.88,75.7 13.53,75.7 12.23,74.4 11.73,74.4 11.73,74.9 13.13,76.3 13.25,76.37 13.38,76.4 15.73,76.4
Net_9 on BOTTOM (solid shape): 17.03,74.9 17.53,74.9 17.53,74.4 16.73,73.6 16.13,73 16.01,72.93 15.88,72.9 13.53,72.9 12.23,71.6 11.73,71.6 11.73,72.1 13.13,73.5 13.25,73.57 13.38,73.6 15.73,73.6
Net_10 on BOTTOM (solid shape): 17.03,72.1 17.53,72.1 17.53,71.6 16.73,70.8 16.13,70.2 16.01,70.13 15.88,70.1 13.53,70.1 12.23,68.8 11.73,68.8 11.73,69.3 13.13,70.7 13.25,70.77 13.38,70.8 15.73,70.8
Net_11 on BOTTOM (solid shape): 17.03,69.3 17.53,69.3 17.53,68.8 16.73,68 16.13,67.4 16.01,67.33 15.88,67.3 13.53,67.3 12.23,66 11.73,66 11.73,66.5 13.13,67.9 13.25,67.97 13.38,68 15.73,68
Net_12 on BOTTOM (solid shape): 17.03,66.5 17.53,66.5 17.53,66 16.73,65.2 16.13,64.6 16.01,64.53 15.88,64.5 13.53,64.5 12.23,63.2 11.73,63.2 11.73,63.7 13.13,65.1 13.25,65.17 13.38,65.2 15.73,65.2
Net_13 on BOTTOM (solid shape): 17.03,63.7 17.53,63.7 17.53,63.2 16.73,62.4 16.13,61.8 16.01,61.73 15.88,61.7 13.53,61.7 12.23,60.4 11.73,60.4 11.73,60.9 13.13,62.3 13.25,62.37 13.38,62.4 15.73,62.4
Net_14 on BOTTOM (solid shape): 17.03,60.9 17.53,60.9 17.53,60.4 16.73,59.6 16.13,59 16.01,58.93 15.88,58.9 13.53,58.9 12.23,57.6 11.73,57.6 11.73,58.1 13.13,59.5 13.25,59.57 13.38,59.6 15.73,59.6
Net_15 on BOTTOM (solid shape): 17.03,58.1 17.53,58.1 17.53,57.6 16.73,56.8 16.13,56.2 16.01,56.13 15.88,56.1 13.53,56.1 12.23,54.8 11.73,54.8 11.73,55.3 13.13,56.7 13.25,56.77 13.38,56.8 15.73,56.8
Net_16 on BOTTOM (solid shape): 17.03,55.3 17.53,55.3 17.53,54.8 16.73,54 16.13,53.4 16.01,53.33 15.88,53.3 13.53,53.3 12.23,52 11.73,52 11.73,52.5 13.13,53.9 13.25,53.97 13.38,54 15.73,54
Net_17 on BOTTOM (solid shape): 17.03,52.5 17.53,52.5 17.53,52 16.73,51.2 16.13,50.6 16.01,50.53 15.88,50.5 13.53,50.5 12.23,49.2 11.73,49.2 11.73,49.7 13.13,51.1 13.25,51.17 13.38,51.2 15.73,51.2
Net_18 on BOTTOM (solid shape): 17.03,49.7 17.53,49.7 17.53,49.2 16.73,48.4 16.13,47.8 16.01,47.73 15.88,47.7 13.53,47.7 12.23,46.4 11.73,46.4 11.73,46.9 13.13,48.3 13.25,48.37 13.38,48.4 15.73,48.4
Net_6 on TOP (solid shape): 18.65,43.5 11.98,43.5 11.63,43.85 11.98,44.2 18.65,44.2
Net_7 on TOP (solid shape): 17.28,77.8 17.63,77.45 17.28,77.1 11.98,77.1 11.63,77.45 11.98,77.8
Net_8 on TOP (solid shape): 17.28,75 17.63,74.65 17.28,74.3 11.98,74.3 11.63,74.65 11.98,75
Net_9 on TOP (solid shape): 17.28,72.2 17.63,71.85 17.28,71.5 11.98,71.5 11.63,71.85 11.98,72.2
Net_10 on TOP (solid shape): 17.28,69.4 17.63,69.05 17.28,68.7 11.98,68.7 11.63,69.05 11.98,69.4
Net_11 on TOP (solid shape): 17.28,66.6 17.63,66.25 17.28,65.9 11.98,65.9 11.63,66.25 11.98,66.6
Net_12 on TOP (solid shape): 17.28,63.8 17.63,63.45 17.28,63.1 11.98,63.1 11.63,63.45 11.98,63.8
Net_13 on TOP (solid shape): 17.28,61 17.63,60.65 17.28,60.3 11.98,60.3 11.63,60.65 11.98,61
Net_14 on TOP (solid shape): 17.28,58.2 17.63,57.85 17.28,57.5 11.98,57.5 11.63,57.85 11.98,58.2
Net_15 on TOP (solid shape): 17.28,55.4 17.63,55.05 17.28,54.7 11.98,54.7 11.63,55.05 11.98,55.4
Net_16 on TOP (solid shape): 17.28,52.6 17.63,52.25 17.28,51.9 11.98,51.9 11.63,52.25 11.98,52.6
Net_17 on TOP (solid shape): 17.28,49.8 17.63,49.45 17.28,49.1 11.98,49.1 11.63,49.45 11.98,49.8
Net_18 on TOP (solid shape): 17.28,47 17.63,46.65 17.28,46.3 11.98,46.3 11.63,46.65 11.98,47

## Text on the board
Ref Des/Silkscreen Top: CC13xx 7x7 SKY66115-11     Z1044-B
XSECTION_CHART: *  SURFACE - AIR 0 MM | L1: TOP CONDUCTOR - COPPER 0.035 MM | *  DIELECTRIC - FR-4 0.73 MM | L2: BOTTOM CONDUCTOR - COPPER 0.035 MM | DESIGN CROSS SECTION CHART | TOTAL THICKNESS 0.8 MM
User.5: FIGURE | SIZE | 0.2 | 0.4 | 1.501 | DRILL CHART: TOP to BOTTOM | ALL UNITS ARE IN MILLIMETERS | PLATED | NON-PLATED | QTY | 397 | 25 | 4
